# Altium PCB M.2 TYPE A.PcbDoc
Units mm, origin at the board's own origin, x right, y up, seen from the top; angles counter-clockwise.
Board outline 83.95 x 22 mm, 4 copper layers (Top Layer, Internal Plane 2, Internal Plane 4, Bottom Layer), stack 0.792 mm thick; 2 components, 0 nets, 138 pads, 0 vias.
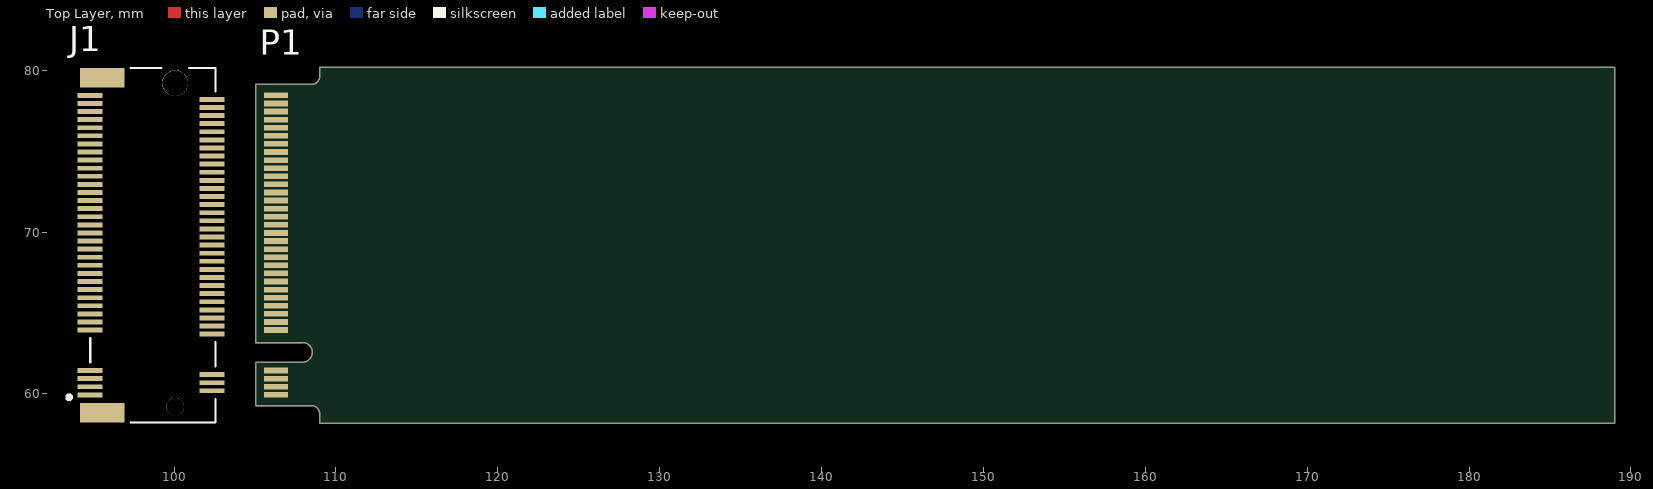
[diagram p0: Top Layer view]
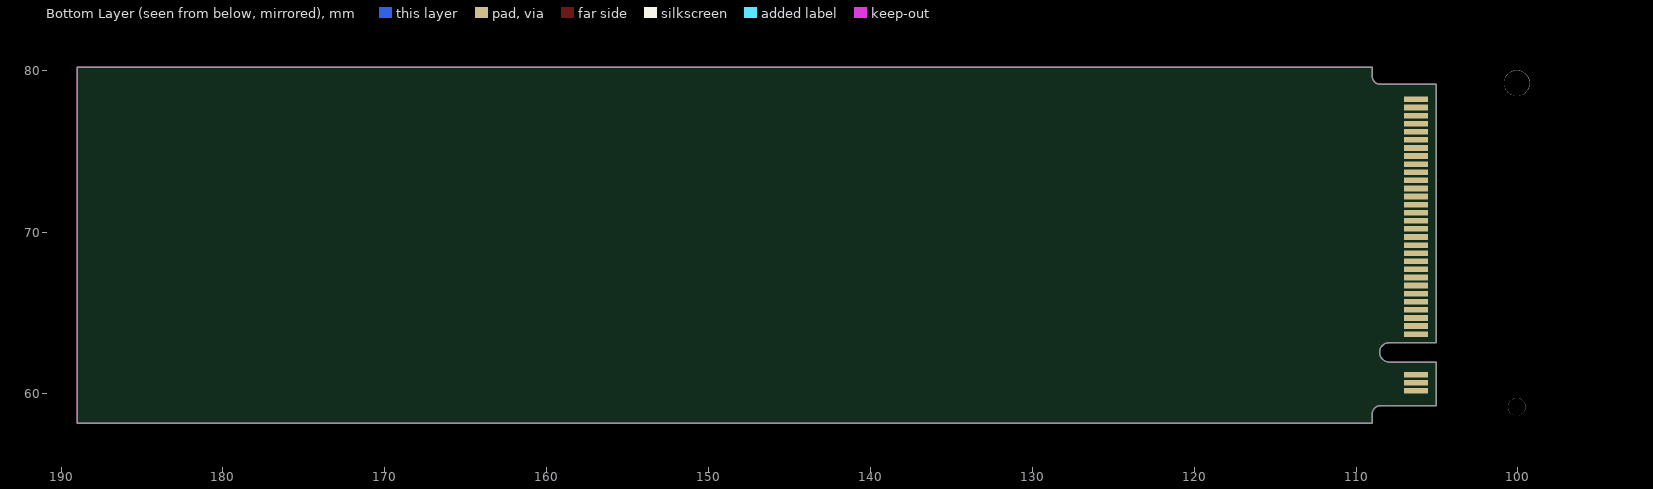
[diagram p1: Bottom Layer view, seen from below]
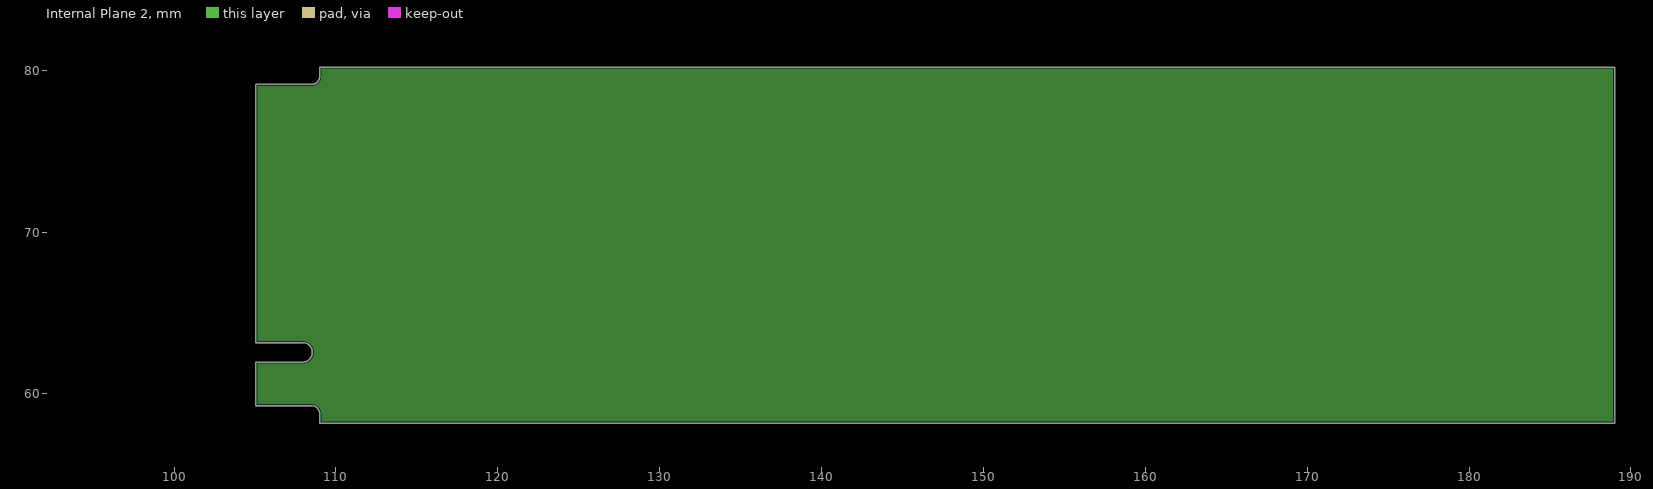
[diagram p2: Internal Plane 2, clearances drawn from the general rule]
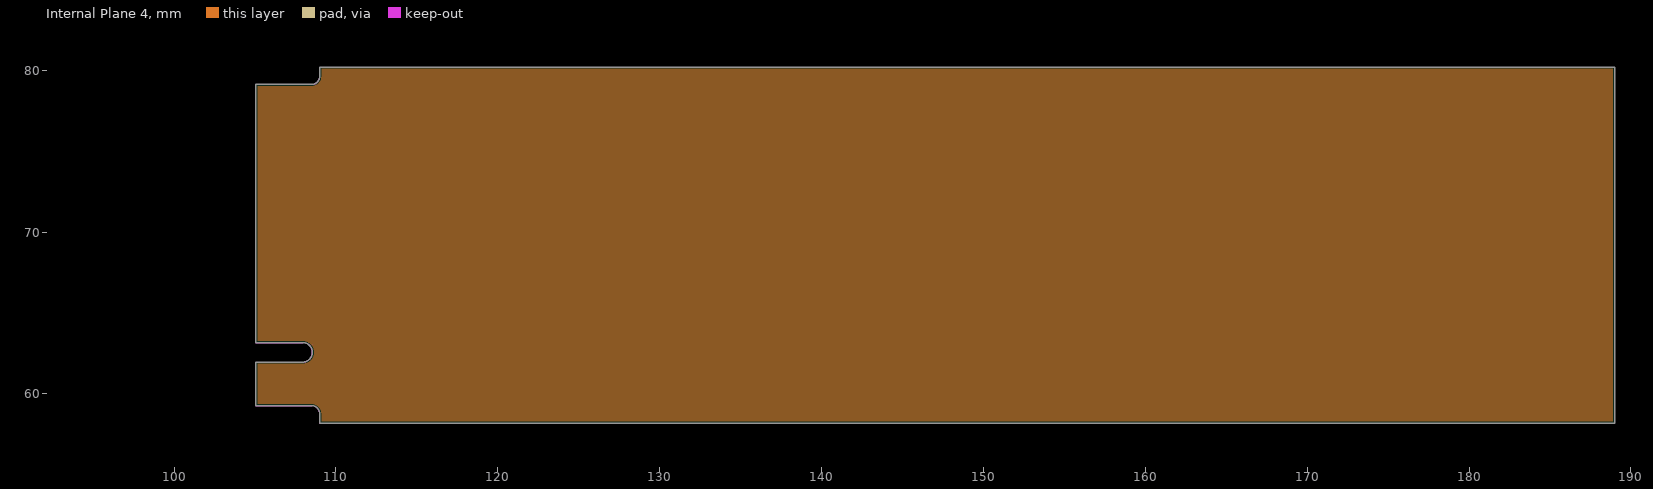
[diagram p3: Internal Plane 4, clearances drawn from the general rule]

## Layer stack, top to bottom
Top Solder: solder mask 0.0102, Solder Resist, Dk 3.5
Top Layer: signal copper 0.0356
Dielectric 1: dielectric 0.2, FR-4, Dk 4.8
Internal Plane 2: plane copper 0.0356
Dielectric3: dielectric 0.25, FR-4, Dk 4.8
Internal Plane 4: plane copper 0.0356
Dielectric5: dielectric 0.2, FR-4, Dk 4.8
Bottom Layer: signal copper 0.0356
Bottom Solder: solder mask 0.0102, Solder Resist, Dk 3.5

## Board outline
105.049,61.971 107.949,61.971 ccw(c107.949,62.571) 108.549,62.571 ccw(c107.949,62.571) 107.949,63.171 105.049,63.171 105.049,79.121 108.499,79.121 ccw(c108.499,79.621) 108.999,79.621 108.999,80.196 188.999,80.196 188.999,58.196 108.999,58.196 108.999,58.771 ccw(c108.499,58.771) 108.499,59.271 105.049,59.271

## Design rules (kind name [scope] priority, off if disabled: settings)
Clearance [All] p1: gap=0.254 ignorepadtopadclearanceinfootprint=FALSE except(0: Arc-Hole Track-Hole SMDPad-Hole THPad-Hole Via-Hole Fill-Hole Poly-Hole Region-Hole Text-Hole)
PlaneClearance [All] p1: clearance=0.508
PlaneConnect [All] p1: planeconnectstyle=Relief reliefexpansion=0.508 reliefentries=4 reliefconductorwidth=0.254 reliefairgap=0.254
PolygonConnect [All] p1: connectstyle=Relief reliefconductorwidth=0.254 reliefentries=4 polygonreliefangle="90 Angle" airgapwidth=0.254
RoutingVias [All] p1: holewidth=0.711 width=1.27 viastyle="Through Hole" minholewidth=0.711 minwidth=1.27 maxholewidth=0.711 maxwidth=1.27
SolderMaskExpansion [All] p1: expansion=0.102 istentingtop=FALSE
Width [All] p1: maxlimit=0.254 minlimit=0.254 preferedwidth=0.254
28 further rules are at their usual default settings.

## Components (designator, comment, footprint, x,y, rotation, side; value= is the part's Value field where it differs from the comment)
J1 "2199230-8" CON-2199230-8 98.574,69.196 r90 top
P1 "PCB Template" M.2_A_2240_CARD 106.299,69.196 r90 top

## Footprints (in the part's own frame and the unit in brackets; to place one, negate y for a bottom-side part, rotate by r counter-clockwise, add the part's x,y. Pads: shape width x height; smd on the part's side, far side on the other; paste and mask are expansions set on the pad)
CON-2199230-8 [mm] "TE-2199230-8-M.2 (NGFF) Mini Card"
  rect 0.3x1.55 smd mask+0.05: 1(-9.25,3.775) 2(-9,-3.775) 3(-8.75,3.775) 4(-8.5,-3.775) 5(-8.25,3.775) 6(-8,-3.775) 7(-7.75,3.775) 16(-5.5,-3.775) 17(-5.25,3.775) 18(-5,-3.775) 19(-4.75,3.775) 20(-4.5,-3.775) 21(-4.25,3.775) 22(-4,-3.775) 23(-3.75,3.775) 24(-3.5,-3.775) 25(-3.25,3.775) 26(-3,-3.775) 27(-2.75,3.775) 28(-2.5,-3.775) 29(-2.25,3.775) 30(-2,-3.775) 31(-1.75,3.775) 32(-1.5,-3.775) 33(-1.25,3.775) 34(-1,-3.775) 35(-0.75,3.775) 36(-0.5,-3.775) 37(-0.25,3.775) 38(0,-3.775) 39(0.25,3.775) 40(0.5,-3.775) 41(0.75,3.775) 42(1,-3.775) 43(1.25,3.775) 44(1.5,-3.775) 45(1.75,3.775) 46(2,-3.775) 47(2.25,3.775) 48(2.5,-3.775) 49(2.75,3.775) 50(3,-3.775) 51(3.25,3.775) 52(3.5,-3.775) 53(3.75,3.775) 54(4,-3.775) 55(4.25,3.775) 56(4.5,-3.775) 57(4.75,3.775) 58(5,-3.775) 59(5.25,3.775) 60(5.5,-3.775) 61(5.75,3.775) 62(6,-3.775) 63(6.25,3.775) 64(6.5,-3.775) 65(6.75,3.775) 66(7,-3.775) 67(7.25,3.775) 68(7.5,-3.775) 69(7.75,3.775) 70(8,-3.775) 71(8.25,3.775) 72(8.5,-3.775) 73(8.75,3.775) 74(9,-3.775) 75(9.25,3.775)
  rect 1.2x2.75 smd mask+0.05: SH1(-10.35,3) SH2(10.35,3)
  round 1.1 hole 1.1 unplated: ""(-10,-1.5)
  round 1.6 hole 1.6 unplated: ""(10,-1.5)
  silkscreen extent -10.95,-4 10.95,5.17, body extent -10.95,-4.35 10.95,4.35, height 4.1
M.2_A_2240_CARD [mm]
  rect 0.35x1.5 smd paste-1: 1(-9.25,0) 3(-8.75,0) 5(-8.25,0) 7(-7.75,0) 17(-5.25,0) 19(-4.75,0) 21(-4.25,0) 23(-3.75,0) 25(-3.25,0) 27(-2.75,0) 29(-2.25,0) 31(-1.75,0) 33(-1.25,0) 35(-0.75,0) 37(-0.25,0) 39(0.25,0) 41(0.75,0) 43(1.25,0) 45(1.75,0) 47(2.25,0) 49(2.75,0) 51(3.25,0) 53(3.75,0) 55(4.25,0) 57(4.75,0) 59(5.25,0) 61(5.75,0) 63(6.25,0) 65(6.75,0) 67(7.25,0) 69(7.75,0) 71(8.25,0) 73(8.75,0) 75(9.25,0)
  rect 0.35x1.5 smd far side paste-1: 2(-9,0) 4(-8.5,0) 6(-8,0) 16(-5.5,0) 18(-5,0) 20(-4.5,0) 22(-4,0) 24(-3.5,0) 26(-3,0) 28(-2.5,0) 30(-2,0) 32(-1.5,0) 34(-1,0) 36(-0.5,0) 38(0,0) 40(0.5,0) 42(1,0) 44(1.5,0) 46(2,0) 48(2.5,0) 50(3,0) 52(3.5,0) 54(4,0) 56(4.5,0) 58(5,0) 60(5.5,0) 62(6,0) 64(6.5,0) 66(7,0) 68(7.5,0) 70(8,0) 72(8.5,0) 74(9,0)

## Part data
J1: library part CON-2199230-8, "67 Position Female Connector M.2 (NGFF) Mini Card Gold 0.020\" (0.50mm) Black"
P1: library part CON-2199230-8

## Nets (pads, with @x,y where several pads share a name; then routed paths per layer and width w, separated by ;. In a path a pad name is that pad's centre, name@x,y a point inside that pad or via, vN(x,y) a via of type N, cw(c..) or ccw(c..) an arc to the next point about the centre after c; other vN are vias at no path point)
pads on no net: J1. J1.1 J1.2 J1.3 J1.4 J1.5 J1.6 J1.7 J1.16 J1.17 J1.18 J1.19 J1.20 J1.21 J1.22 J1.23 J1.24 J1.25 J1.26 J1.27 J1.28 J1.29 J1.30 J1.31 J1.32 J1.33 J1.34 J1.35 J1.36 J1.37 J1.38 J1.39 J1.40 J1.41 J1.42 J1.43 J1.44 J1.45 J1.46 J1.47 J1.48 J1.49 J1.50 J1.51 J1.52 J1.53 J1.54 J1.55 J1.56 J1.57 J1.58 J1.59 J1.60 J1.61 J1.62 J1.63 J1.64 J1.65 J1.66 J1.67 J1.68 J1.69 J1.70 J1.71 J1.72 J1.73 J1.74 J1.75 J1.SH1 J1.SH2 P1.1 P1.2 P1.3 P1.4 P1.5 P1.6 P1.7 P1.16 P1.17 P1.18 P1.19 P1.20 P1.21 P1.22 P1.23 P1.24 P1.25 P1.26 P1.27 P1.28 P1.29 P1.30 P1.31 P1.32 P1.33 P1.34 P1.35 P1.36 P1.37 P1.38 P1.39 P1.40 P1.41 P1.42 P1.43 P1.44 P1.45 P1.46 P1.47 P1.48 P1.49 P1.50 P1.51 P1.52 P1.53 P1.54 P1.55 P1.56 P1.57 P1.58 P1.59 P1.60 P1.61 P1.62 P1.63 P1.64 P1.65 P1.66 P1.67 P1.68 P1.69 P1.70 P1.71 P1.72 P1.73 P1.74 P1.75

## Polygon pours and split planes (outlines as drawn)
no net on Internal Plane 2 (split plane): 188.897,58.298 109.101,58.298 109.101,58.771 109.101,58.772 109.093,58.865 109.071,58.957 109.035,59.045 108.986,59.125 108.925,59.197 108.853,59.258 108.772,59.308 108.685,59.344 108.593,59.366 108.5,59.373 108.499,59.373 105.151,59.373 105.151,61.869 107.949,61.869 108.059,61.877 108.166,61.903 108.268,61.945 108.362,62.003 108.446,62.074 108.517,62.158 108.575,62.252 108.617,62.354 108.643,62.461 108.651,62.571 108.643,62.681 108.617,62.788 108.575,62.89 108.517,62.984 108.446,63.068 108.362,63.139 108.268,63.197 108.166,63.239 108.059,63.265 107.949,63.273 105.151,63.273 105.151,79.019 108.499,79.019 108.5,79.02 108.593,79.027 108.685,79.049 108.772,79.085 108.853,79.134 108.925,79.196 108.986,79.268 109.035,79.348 109.071,79.435 109.093,79.527 109.101,79.62 109.101,79.621 109.101,80.094 188.897,80.094
no net on Internal Plane 4 (split plane): 188.897,58.298 109.101,58.298 109.101,58.771 109.101,58.772 109.093,58.865 109.071,58.957 109.035,59.045 108.986,59.125 108.925,59.197 108.853,59.258 108.772,59.308 108.685,59.344 108.593,59.366 108.5,59.373 108.499,59.373 105.151,59.373 105.151,61.869 107.949,61.869 108.059,61.877 108.166,61.903 108.268,61.945 108.362,62.003 108.446,62.074 108.517,62.158 108.575,62.252 108.617,62.354 108.643,62.461 108.651,62.571 108.643,62.681 108.617,62.788 108.575,62.89 108.517,62.984 108.446,63.068 108.362,63.139 108.268,63.197 108.166,63.239 108.059,63.265 107.949,63.273 105.151,63.273 105.151,79.019 108.499,79.019 108.5,79.02 108.593,79.027 108.685,79.049 108.772,79.085 108.853,79.134 108.925,79.196 108.986,79.268 109.035,79.348 109.071,79.435 109.093,79.527 109.101,79.62 109.101,79.621 109.101,80.094 188.897,80.094

## Keep-outs
Keep-Out Layer:
  lines w0.05: 108.549,62.571 cw(c107.949,62.571) 107.949,61.971 105.049,61.971 105.049,59.271 108.499,59.271 cw(c108.499,58.771) 108.999,58.771 108.999,58.196 188.999,58.196 188.999,80.196 108.999,80.196 108.999,79.621 cw(c108.499,79.621) 108.499,79.121 105.049,79.121 105.049,63.171 107.949,63.171 cw(c107.949,62.571) 108.549,62.571 ; 105.049,63.671 ccw(c105.049,63.671) 105.049,63.671 ; 108.549,63.071 108.549,63.071